# Altium PCB PCB1.PcbDoc
Units mm, origin at the board's own origin, x right, y up, seen from the top; angles counter-clockwise.
Board outline 89.53 x 84.58 mm, 2 copper layers (Top Layer, Bottom Layer); 78 components, 88 nets, 352 pads, 108 vias.
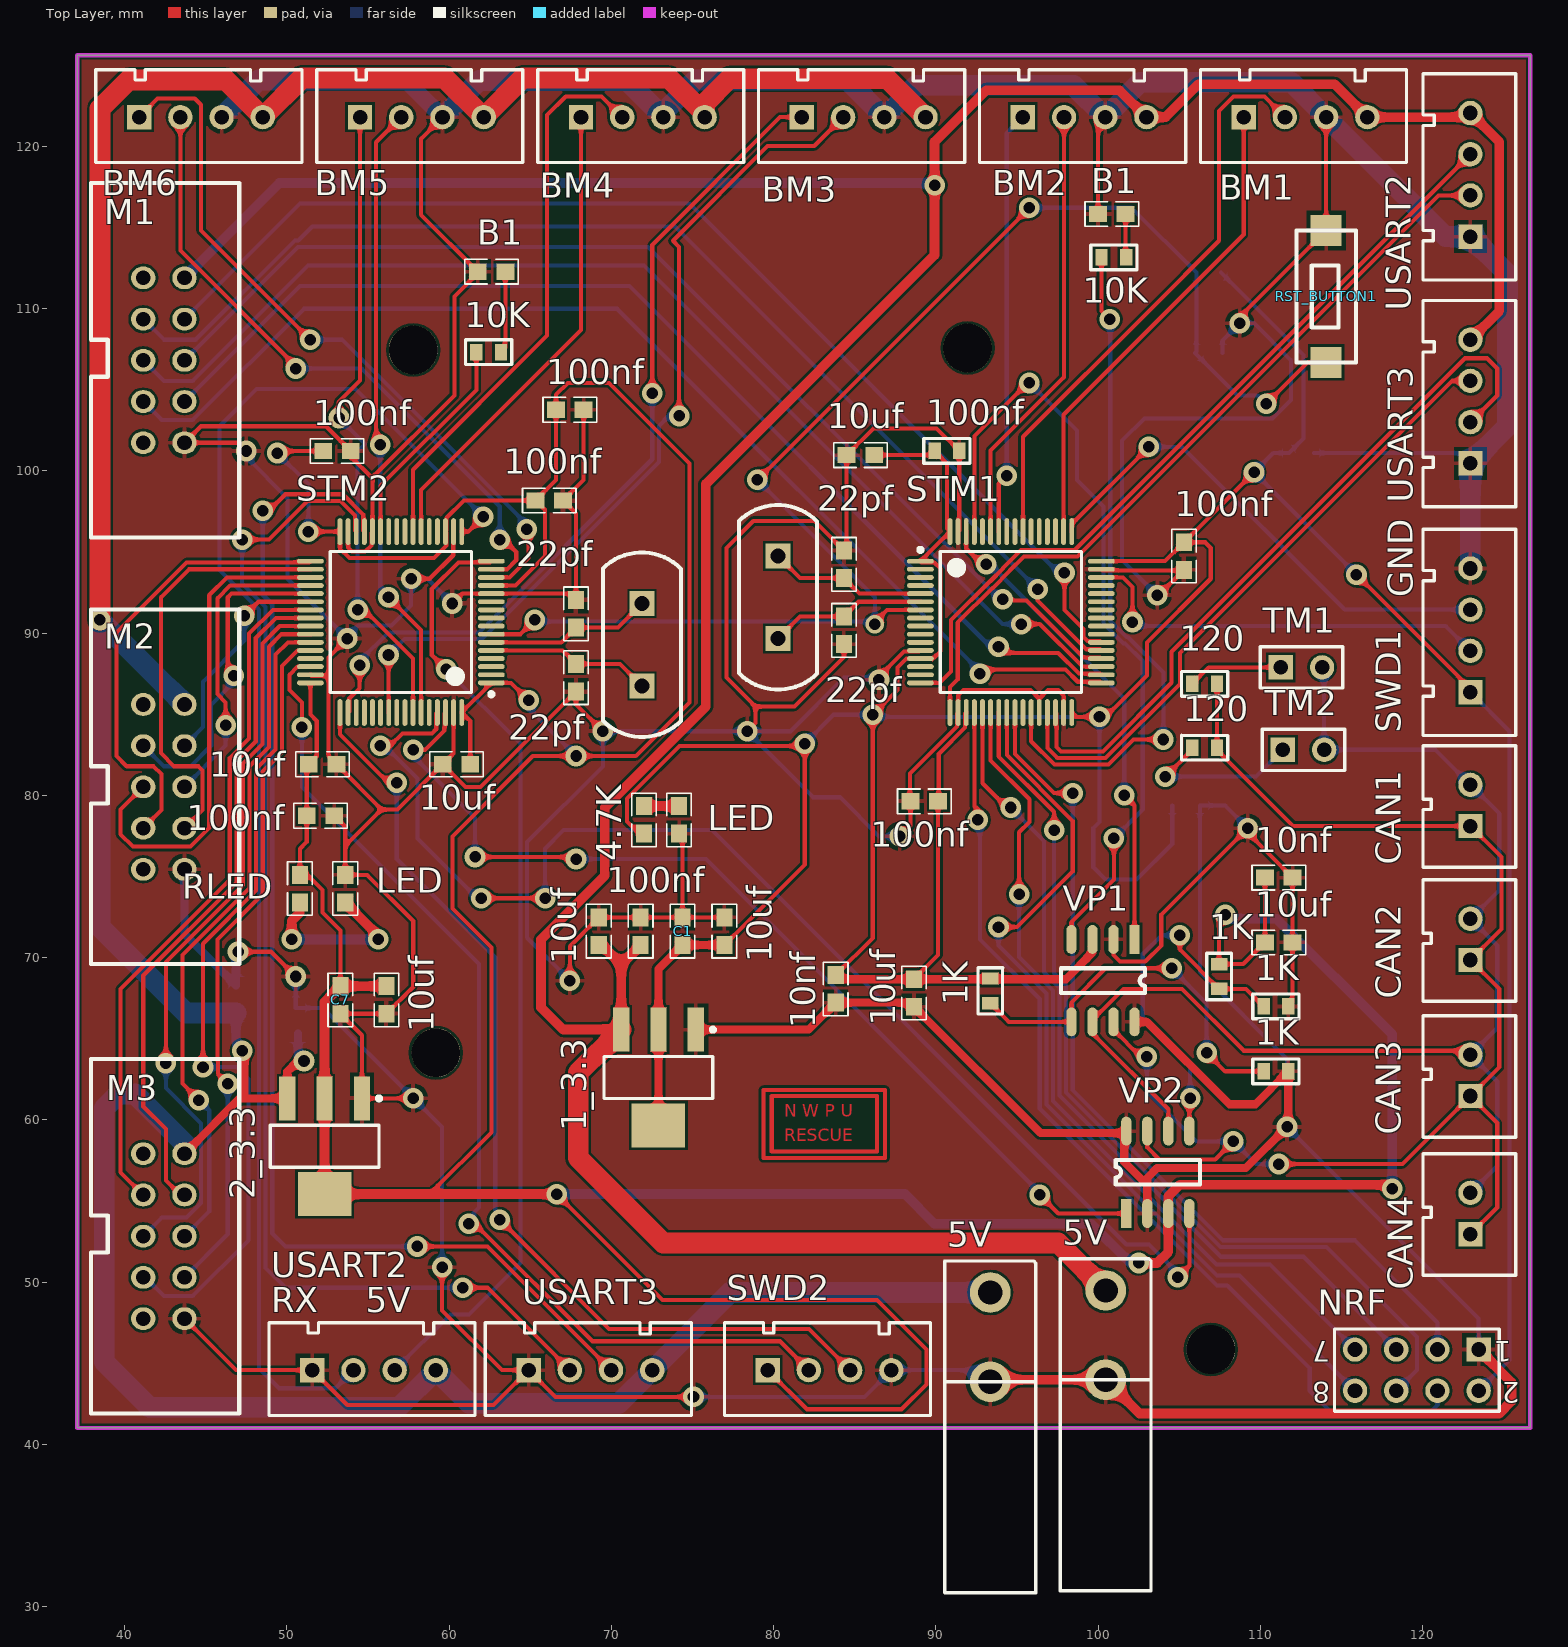
[diagram p0: Top Layer view]
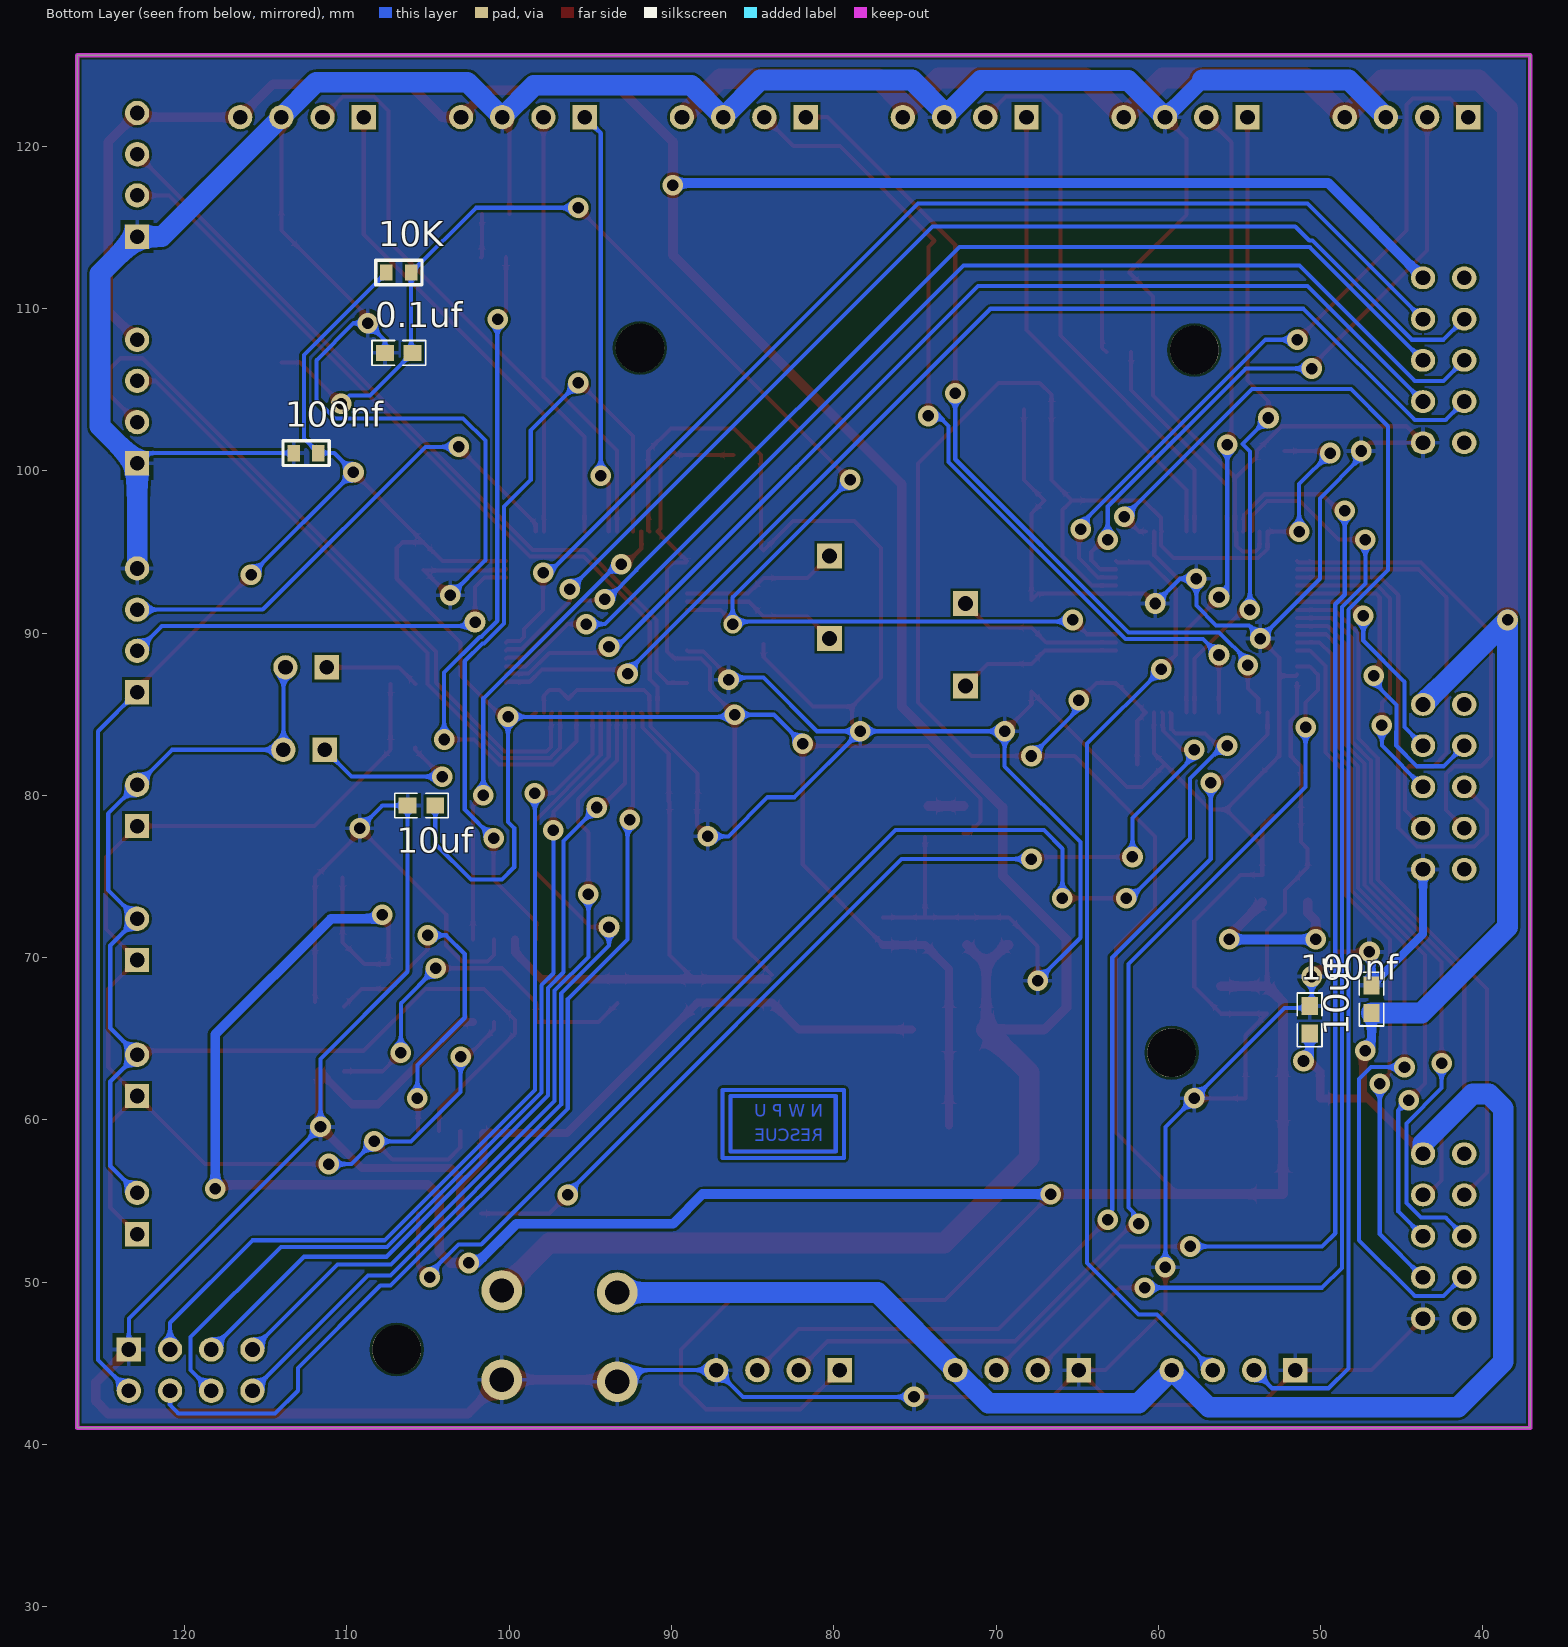
[diagram p1: Bottom Layer view, seen from below]

## Layer stack, top to bottom
Top Solder: solder mask 0.0102, Solder Resist, Dk 3.5
Top Layer: signal copper 0.0356
Dielectric 1: dielectric 0.32, FR-4, Dk 4.8
Bottom Layer: signal copper 0.0356
Bottom Solder: solder mask 0.0102, Solder Resist, Dk 3.5

## Board outline
37.084,41.021 37.084,125.603 126.619,125.603 126.619,41.021

## Design rules (kind name [scope] priority, off if disabled: settings)
Clearance [All] p1: gap=0.152
PolygonConnect [All] p1: connectstyle=Relief reliefconductorwidth=0.254 reliefentries=4 polygonreliefangle="90 Angle" airgapwidth=0.254
RoutingVias [All] p1: holewidth=0.711 width=1.27 viastyle="Through Hole" minholewidth=0.711 minwidth=1.27 maxholewidth=0.711 maxwidth=1.27
SolderMaskExpansion [All] p1: expansion=0.102
Width [All] p1: maxlimit=1.27 minlimit=0.2 preferedwidth=0.254
30 further rules are at their usual default settings.

## Classes and differential pairs
component class Sheet1: 0.1uf 1_3.3 1K 4.7K 5V 10K 10nf 10uf 22pf 100nf 120 B1 C1 LED NRF RST_BUTTON1 TM1 VP1
component class Sheet2: 1K 2_3.3 4.7K 5V 10K 10nf 10uf 22pf 100nf 120 B1 C7 LED M2 M3 TM2 VP2

## Components (designator, comment, footprint, x,y, rotation, side; value= is the part's Value field where it differs from the comment)
0.1uf "0.1uf" 0603 106.807,107.264 r0 bottom (schematic designator C_RST1)
1_3.3 "1117_WYN" SOT223_M 72.898,62.611 r270 top (schematic designator 1)
1K "1k" 0603_WYH 93.345,67.945 r90 top (schematic designator CANR1)
1K "1k" 0603_WYH 110.95,62.992 r0 top (schematic designator CANR2)
1K "1k" 0603_WYH 107.442,68.834 r90 top (schematic designator CANR3)
1K "1k" 0603_WYH 110.95,66.988 r0 top (schematic designator CANR4)
2 "XTAL1" XTAL_D 80.264,94.742 r270 top
2_3.3 "1117_WYN" SOT223_M 52.324,58.374 r270 top (schematic designator 4)
4.7K "4.7K" 0603 72.009,78.486 r270 top (schematic designator R_LED1)
5 "XTAL" XTAL_D 71.882,86.741 r90 top
5V "Header2" Power 100.457,43.942 r90 top (schematic designator E_HEAD1)
5V "Header2" POWER 93.345,43.815 r90 top (schematic designator E_HEAD3)
10K "10K" 0603_WYH 100.965,113.157 r0 top (schematic designator LS3)
10K "10K" 0603_WYH 62.436,107.315 r0 top (schematic designator LS6)
10K "R_10K" 0603_WYH 106.807,112.218 r180 bottom (schematic designator R_RST1)
10nf "10nF" 0603 83.82,68.072 r90 top (schematic designator C_CAN2)
10nf "10nF" 0603 111.125,74.93 r180 top (schematic designator C_CAN4)
10uf "10uf" 0603 76.962,71.628 r90 top (schematic designator C2)
10uf "10uf" 0603 69.215,71.628 r90 top (schematic designator C4)
10uf "10uf" 0603 56.134,67.391 r270 top (schematic designator C8)
10uf "10uf" 0603 46.863,67.437 r90 bottom (schematic designator C10)
10uf "10uF" 0603 88.646,67.818 r90 top (schematic designator C_CAN1)
10uf "10uF" 0603 111.125,70.934 r180 top (schematic designator C_CAN3)
10uf "10uf" 0603 85.344,100.965 r180 top (schematic designator VDD3)
10uf "10uf" 0603 60.452,81.915 r180 top (schematic designator VDD7)
10uf "10uf" 0603 52.197,81.915 r0 top (schematic designator VDDA4)
10uf "10uf" 0603 105.41,79.375 r0 bottom (schematic designator VDDA2)
22pf "22pf" 0603 84.328,94.234 r270 top (schematic designator C5)
22pf "22pf" 0603 84.328,90.17 r90 top (schematic designator C6)
22pf "22pf" 0603 67.818,87.249 r90 top (schematic designator C11)
22pf "22pf" 0603 67.818,91.186 r270 top (schematic designator C12)
100nf "C_100nf" 0603 71.797,71.628 r90 top (schematic designator C3)
100nf "C_100nf" 0603 50.673,66.167 r90 bottom (schematic designator C9)
100nf "100nf" 0603 105.283,94.742 r270 top (schematic designator VDD1)
100nf "100nf" 0603_WYH 90.678,101.219 r0 top (schematic designator VDD2)
100nf "100nf" 0603_WYH 112.522,101.092 r0 bottom (schematic designator VDD4)
100nf "100nf" 0603 52.07,78.74 r0 top (schematic designator VDD5)
100nf "100nf" 0603 53.086,101.219 r0 top (schematic designator VDD6)
100nf "100nf" 0603 67.437,103.759 r0 top (schematic designator VDD8)
100nf "100nf" 0603 89.281,79.629 r180 top (schematic designator VDDA1)
100nf "100nf" 0603 66.167,98.171 r0 top (schematic designator VDDA3)
120 "R_120" 0603_WYH 106.553,86.868 r180 top (schematic designator R1)
120 "R_120" 0603_WYH 106.553,82.931 r180 top (schematic designator R2)
B1 "LED_WYN" 0603 100.838,115.824 r180 top (schematic designator L3)
B1 "LED_WYN" 0603 62.611,112.268 r180 top (schematic designator L6)
BM1 "Comment" XH2.54-4 113.157,124.333 r0 top
BM2 "Comment" XH2.54-4 99.543,124.333 r0 top
BM3 "Comment" XH2.54-4 85.928,124.333 r0 top
BM4 "Comment" XH2.54-4 72.314,124.333 r0 top
BM5 "Comment" XH2.54-4 58.699,124.333 r0 top
BM6 "Comment" XH2.54-4 45.085,124.333 r0 top
C1 "C_100nf" 0603 74.38,71.628 r90 top
C7 "C_100nf" 0603 53.298,67.391 r270 top
CAN1 "Comment" XH2.54_2 121.285,80.391 r90 top
CAN2 "Comment" XH2.54_2 121.285,72.136 r90 top
CAN3 "Comment" XH2.54_2 121.285,63.754 r90 top
CAN4 "Comment" XH2.54_2 121.285,55.245 r90 top
LED "LED_WYN" 0603 74.168,78.486 r270 top (schematic designator E_LED1)
LED "LED_WYN" 0603 53.594,74.249 r90 top (schematic designator E_LED2)
M1 "Comment" JTAG_10to20 41.148,106.807 r0 top
M2 "M1-M2" JTAG_10to20 41.148,80.518 r0 top
M3 "M3-M4" JTAG_10to20 41.148,52.832 r0 top
NRF "Header 4X2" HDR2X4 123.444,45.847 r180 top (schematic designator P6)
RLED "4.7K" 0603 50.8,74.249 r90 top (schematic designator R_LED2)
RST_BUTTON1 "RST_BUTTON" CLCK 114.046,106.68 r90 top
STM1 "STM32_F103" STM32TSQFP50P1200X1200X160-64N 94.615,90.678 r0 top
STM2 "STM32_F103" STM32TSQFP50P1200X1200X160-64N 57.023,90.678 r180 top
SWD1 "Comment" XH2.54-4 120.396,90.551 r90 top
SWD2 "Comment" XH2.54-4 83.82,47.117 r0 top
TM1 "Header2" HDR1X2 111.252,87.884 r0 top
TM2 "Header2" HDR1X2 111.379,82.804 r0 top
USART2 "Comment" XH2.54-4 55.753,47.117 r0 top
USART2 "Comment" XH2.54-4 120.396,118.618 r90 top
USART3 "Comment" XH2.54-4 69.088,47.117 r0 top
USART3 "Comment" XH2.54-4 120.396,104.648 r90 top
VP1 "VP230" VP230 102.235,71.12 r270 top
VP2 "VP230" VP230 101.727,54.229 r90 top
? "Comment" LOGO 81.915,60.579 r0 top

## Footprints (in the part's own frame and the unit in brackets; to place one, negate y for a bottom-side part, rotate by r counter-clockwise, add the part's x,y. Pads: shape width x height; smd on the part's side, far side on the other; paste and mask are expansions set on the pad)
0603 [mm]
  rect 1.1x1 smd: 1(-0.85,0) 2(0.85,0)
  silkscreen extent -1.65,-0.76 1.65,0.76, body extent -1.14,-0.38 1.14,0.38, height 1
0603_WYH [mil]
  rect 30x40 smd: 1(-30,0) 2(30,0)
  silkscreen extent -56,-30 56,30
CLCK [mil]
  rect 75x75 smd: 1(0,0) 2(320,0)
  silkscreen extent 0,-72 320,72
HDR1X2 [mm] "Connector; Header; 2 Position"
  rect 1.5x1.5 hole 0.9: 1(0,0)
  round 1.5 hole 0.9: 2(2.54,0)
  silkscreen extent -1.27,-1.27 3.81,1.27
HDR2X4 [mm] "Connector; Header; 4x2 Position"
  rect 1.5x1.5 hole 0.9: 1(0,0)
  round 1.5 hole 0.9: 2(0,2.54) 3(2.54,0) 4(2.54,2.54) 5(5.08,0) 6(5.08,2.54) 7(7.62,0) 8(7.62,2.54)
  silkscreen extent -1.27,-1.27 8.89,3.81
JTAG_10to20 [mil]
  oval 59x55 hole 35.4: 1(0,200) 2(0,100) 3(0,0) 4(0,-100) 5(0,-200) 6(100,-200) 7(100,-100) 8(100,0) 9(100,100) 10(100,200)
  silkscreen extent -127,-430 233,430
LOGO [mm]
  Top Layer lines w0.254: -2.54,-2.921 4.953,-2.921 4.953,1.27 -2.54,1.27 -2.54,1.016 -2.54,-2.921 ; -2.032,-2.54 4.445,-2.54 4.445,0.889 -2.032,0.889 -2.032,-2.54
  Bottom Layer lines w0.254: -2.54,-2.921 4.953,-2.921 4.953,1.27 -2.54,1.27 -2.54,-2.921 ; -2.032,-2.54 4.445,-2.54 4.445,0.889 -2.032,0.889 -2.032,-2.54
Power [mm]
  round 2.5 hole 1.5: 1(5.546,0) 2(0.046,0)
  silkscreen extent -12.95,-2.8 7.49,2.8
POWER [mm]
  round 2.5 hole 1.5: 1(5.546,0) 2(0.046,0)
  silkscreen extent -12.95,-2.8 7.49,2.8
SOT223_M [mm] "SOT223, 4-Leads, Body 6.5x3.5mm, Pitch 2.3mm, Lead Span 7mm, IPC Low Density"
  rect 2.7x1 smd: 1(-2.95,2.3) 2(-2.95,0) 3(-2.95,-2.3)
  rect 2.7x3.3 smd: 4(2.95,0)
  silkscreen extent -3.07,-3.35 1.3,3.48, body extent -1.85,-3.35 1.85,3.35, height 1.7
STM32TSQFP50P1200X1200X160-64N [mm] "TSQFP, 64-Leads, Body 12.0x12.0mm (max), Pitch 0.50mm, IPC Medium Density"
  oval 1.65x0.3 smd: 1(-5.575,3.75) 2(-5.575,3.25) 3(-5.575,2.75) 4(-5.575,2.25) 5(-5.575,1.75) 6(-5.575,1.25) 7(-5.575,0.75) 8(-5.575,0.25) 9(-5.575,-0.25) 10(-5.575,-0.75) 11(-5.575,-1.25) 12(-5.575,-1.75) 13(-5.575,-2.25) 14(-5.575,-2.75) 15(-5.575,-3.25) 16(-5.575,-3.75) 33(5.575,-3.75) 34(5.575,-3.25) 35(5.575,-2.75) 36(5.575,-2.25) 37(5.575,-1.75) 38(5.575,-1.25) 39(5.575,-0.75) 40(5.575,-0.25) 41(5.575,0.25) 42(5.575,0.75) 43(5.575,1.25) 44(5.575,1.75) 45(5.575,2.25) 46(5.575,2.75) 47(5.575,3.25) 48(5.575,3.75)
  oval 0.3x1.65 smd: 17(-3.75,-5.575) 18(-3.25,-5.575) 19(-2.75,-5.575) 20(-2.25,-5.575) 21(-1.75,-5.575) 22(-1.25,-5.575) 23(-0.75,-5.575) 24(-0.25,-5.575) 25(0.25,-5.575) 26(0.75,-5.575) 27(1.25,-5.575) 28(1.75,-5.575) 29(2.25,-5.575) 30(2.75,-5.575) 31(3.25,-5.575) 32(3.75,-5.575) 49(3.75,5.575) 50(3.25,5.575) 51(2.75,5.575) 52(2.25,5.575) 53(1.75,5.575) 54(1.25,5.575) 55(0.75,5.575) 56(0.25,5.575) 57(-0.25,5.575) 58(-0.75,5.575) 59(-1.25,5.575) 60(-1.75,5.575) 61(-2.25,5.575) 62(-2.75,5.575) 63(-3.25,5.575) 64(-3.75,5.575)
  silkscreen extent -5.7,-4.35 4.35,4.57, body extent -5,-5 5,5, height 1.6
VP230 [mil]
  rect 70x25 smd: 1(0,0)
  oval 70x25 smd: 2(0,-51) 3(0,-102) 4(0,-153) 5(200,-153) 6(200,-102) 7(200,-51) 8(200,0)
  silkscreen extent 70,-178 130,26
XH2.54-4 [mm]
  rect 1.5x1.5 hole 0.9: 1(-4.191,-2.54)
  round 1.5 hole 0.9: 2(-1.651,-2.54) 3(0.889,-2.54) 4(3.429,-2.54)
  silkscreen extent -6.86,-5.33 5.84,0.38
XH2.54_2 [mm]
  rect 1.5x1.5 hole 0.9: 1(-2.286,-1.651)
  round 1.5 hole 0.9: 2(0.254,-1.651)
  silkscreen extent -4.83,-4.44 2.67,1.27
XTAL_D [mil]
  rect 60x60 hole 36 paste+0: 1(0,0) 2(200,0)
  silkscreen extent -124,-95 324,95

## Part data
0.1uf 10nf 10nf 10uf 10uf 10uf 10uf 10uf 10uf 10uf 10uf 10uf 10uf 22pf 22pf 22pf 22pf 100nf 100nf 100nf 100nf 100nf 100nf 100nf 100nf 100nf 100nf C1 C7: library part CAP_WYN
1K 1K 1K 1K 10K 10K 10K 120 120: library part R
2: library part XTAL
4.7K RLED: library part RES_WYN
M2 M3: library part 电机接口
NRF: "Header, 4-Pin, Dual row"

## Free pads (board coordinates)
  round 3 hole 3 unplated: 1(59.182,64.135) 2(106.934,45.847) 3(91.948,107.569) 4(57.785,107.442)

## Via types
v1: diameter 1.27, hole 0.711, Top Layer to Bottom Layer, 107 vias
v2: diameter 1.15, hole 0.711, Top Layer to Bottom Layer, 1 vias

## Nets (pads, with @x,y where several pads share a name; then routed paths per layer and width w, separated by ;. In a path a pad name is that pad's centre, name@x,y a point inside that pad or via, vN(x,y) a via of type N, cw(c..) or ccw(c..) an arc to the next point about the centre after c; other vN are vias at no path point)
B1_PA15: BM3.1 STM2.50 | length 52.3
  Top Layer w0.254: STM2.50 53.844,85.174 53.844,85.956 54.483,86.595 v1(54.483,88.011) ; v1(72.517,104.775) 72.517,113.919 80.391,121.793 BM3.1
  Bottom Layer w0.254: v1(54.483,88.011) 54.483,88.265 56.261,90.043 61.849,90.043 72.517,100.711 v1(72.517,104.775)
B1_PB3: BM3.2 STM2.55 | length 53.5
  Top Layer w0.254: v1(56.261,88.646) 56.273,88.634 STM2.55 ; v1(74.168,103.378) 74.168,113.792 73.787,114.173 79.629,120.015 82.499,120.015 BM3.2
  Bottom Layer w0.254: v1(56.261,88.646) 57.252,89.637 62.017,89.637 72.923,100.543 72.923,102.768 73.533,103.378 v1(74.168,103.378)
B2_PA6: BM4.1 STM2.22 | length 29.6
  Top Layer w0.254: STM2.22 58.273,98.826 68.123,108.676 BM4.1
B2_PA7: BM4.2 STM2.23 | length 34.7
  Top Layer w0.254: STM2.23 57.773,100.064 66.04,108.331 66.04,121.92 67.183,123.063 69.393,123.063 BM4.2
B3_PB6: BM5.1 STM2.58 | length 39.7
  Top Layer w0.254: v1(53.213,103.251) 53.213,104.267 54.508,105.562 BM5.1 ; v1(54.356,91.44) 54.76,91.44 57.773,88.427 STM2.58
  Bottom Layer w0.254: v1(53.213,103.251) 54.812,101.652 54.356,101.196 v1(54.356,91.44)
B3_PB7: BM5.2 STM2.59 | length 38.6
  Top Layer w0.254: v1(55.753,101.6) 55.499,101.854 55.499,120.244 BM5.2 ; v1(56.261,92.202) 58.273,90.19 STM2.59
  Bottom Layer w0.254: v1(55.753,101.6) 55.753,92.456 56.007,92.202 v1(56.261,92.202)
B4_PA0: BM6.1 STM2.14 | length 44.6
  Top Layer w0.254: BM6.1 42.037,122.936 44.323,122.936 44.704,122.555 44.704,114.808 v1(51.435,108.077) ; STM2.14 63.71,93.428 64.897,94.615 64.897,96.012 v1@64.643,96.266
  Bottom Layer w0.254: v1(51.435,108.077) 53.407,108.077 64.77,96.714 v1(64.77,96.393)
B4_PA1: BM6.2 STM2.15 | length 40.2
  Top Layer w0.254: BM6.2 43.434,113.575 50.546,106.463 v1(50.546,106.299) ; STM2.15 63.575,93.928 64.135,94.488 64.135,94.996 63.373,95.758 v1(63.119,95.758)
  Bottom Layer w0.254: v1(50.546,106.299) 54.61,106.299 63.119,97.79 v1(63.119,95.758)
B11_PA15: BM1.1 STM1.50 | length 30.1
  Top Layer w0.254: STM1.50 97.865,103.453 108.966,114.554 BM1.1
B11_PB3: BM1.2 STM1.55 | length 35.9
  Top Layer w0.254: STM1.55 95.365,102.096 103.188,109.918 107.442,114.173 107.442,122.174 108.331,123.063 110.236,123.063 BM1.2
B13_PB6: BM2.1 STM1.58 | length 26.2
  Top Layer w0.254: STM1.58 93.865,99.199 v1(94.361,99.695)
  Bottom Layer w0.254: v1(94.361,99.695) 94.361,120.802 BM2.1
B13_PB7: BM2.2 STM1.59 | length 27.4
  Top Layer w0.254: STM1.59 93.365,101.239 97.892,105.766 BM2.2
BT_RX: STM1.43
BT_TX: STM1.42
CANH: 120.1 CAN1.1 CAN2.1 CAN3.1 CAN4.1 VP1.7 VP2.7 | length 87.2
  Top Layer w0.254: VP1.7 100.94,65.557 102.616,63.881 v1(102.997,63.881) ; VP2.7 103.022,58.289 103.759,57.552 107.209,57.552 v1(108.331,58.674) ; 120.1@107.315,86.868 107.315,82.804 112.014,78.105 CAN1.1 124.841,76.2 124.841,71.755 CAN2.1 124.714,68.072 124.714,63.246 CAN3.1 ; v1(111.125,57.277) 118.745,57.277 CAN3.1 ; CAN4.1 124.587,54.61 124.587,59.817 CAN3.1
  Bottom Layer w0.254: v1(102.997,63.881) 102.997,61.722 106.045,58.674 v1(108.331,58.674) 109.728,57.277 v1(111.125,57.277)
CANL: CAN1.2 CAN2.2 CAN3.2 CAN4.2 TM1.2 TM2.2 VP1.6 VP2.6 | length 79
  Top Layer w0.254: VP2.6 104.318,60.655 99.644,65.329 VP1.6 99.644,66.16 101.556,68.072 105.156,68.072 108.966,64.262 122.682,64.262 CAN3.2
  Bottom Layer w0.254: TM1.2 113.919,87.757 TM2.2 120.777,82.804 CAN1.2 124.714,78.867 124.714,74.168 CAN2.2 124.587,70.739 124.587,65.659 CAN3.2 124.587,62.357 124.587,57.15 CAN4.2
CANRX1: STM1.61 VP1.4 | length 49.7
  Top Layer w0.254: STM1.61 92.365,102.144 v1@95.694,105.474 ; VP1.4 98.349,72.187 100.965,74.803 v1(100.965,77.343)
  Bottom Layer w0.254: v1(95.758,105.41) 98.679,102.489 98.679,99.441 100.33,97.79 100.33,90.588 101.561,89.357 101.651,89.357 102.743,88.265 102.743,79.121 v1(100.965,77.343)
CANRX2: STM2.61 VP2.4 | length 79.9
  Top Layer w0.254: v1(55.753,83.058) 56.365,83.058 57.127,83.82 58.949,83.82 59.202,84.073 59.202,85.032 STM2.61 ; v1@61.976,73.787 v1(61.976,73.66) v1(65.913,73.66) ; v1(104.902,50.292) 105.613,51.003 VP2.4
  Bottom Layer w0.254: v1@56.007,82.804 v1(55.753,83.058) 56.007,83.058 58.039,81.026 58.039,77.343 61.722,73.66 v1(61.976,73.66) ; v1(65.913,73.66) 65.913,76.708 67.056,77.851 76.2,77.851 101.727,52.324 103.124,52.324 104.902,50.546 v1(104.902,50.292)
CANTX1: STM1.62 VP1.1 | length 29.8
  Top Layer w0.254: STM1.62 91.865,95.206 92.837,94.234 v1(93.091,94.234) ; v1(101.6,80.01) 102.235,79.375 VP1.1
  Bottom Layer w0.254: v1@93.218,94.361 101.6,85.979 101.6,85.344 ; v1(101.6,80.01) 101.6,85.471
CANTX2: STM2.62 VP2.1 | length 61.2
  Top Layer w0.254: v1(57.785,82.804) 58.508,82.804 59.702,83.999 59.702,85.032 STM2.62 ; v1(61.595,76.2) v1@67.818,76.2 ; v1(96.393,55.372) 97.536,54.229 VP2.1
  Bottom Layer w0.254: v1(57.785,82.804) 57.785,82.423 61.595,78.613 v1(61.595,76.2) ; v1(67.818,76.073) 75.819,76.073 96.139,55.753 96.139,55.372 v1@96.393,55.118
CE: NRF.3 STM1.25 | length 55.5
  Top Layer w0.254: STM1.25 94.865,82.554 97.282,80.137 v1(98.425,80.137)
  Bottom Layer w0.254: v1(98.425,80.137) 98.425,61.849 107.696,52.578 115.824,52.578 120.904,47.498 NRF.3
CSN: NRF.4 STM1.20 | length 60.3
  Top Layer w0.254: STM1.20 92.365,79.339 v1@93.027,78.676
  Bottom Layer w0.254: v1(92.583,78.486) 92.71,78.359 92.71,71.12 96.393,67.437 96.393,60.706 107.315,49.784 107.95,49.784 113.03,44.704 113.03,43.307 114.427,41.91 120.396,41.91 120.904,42.418 NRF.4
GND: 0.1uf.2 1_3.3.1 1K.2@111.712,62.992 1K.2@111.712,66.988 2_3.3.1 5V.2 10nf.1 10uf.1@88.646,66.968 10uf.1@111.975,70.934 10uf.2@46.863,68.287 10uf.2@53.047,81.915 10uf.2@56.134,66.541 10uf.2@59.602,81.915 10uf.2@69.215,72.478 10uf.2@76.962,72.478 10uf.2@84.494,100.965 10uf.2@106.26,79.375 22pf.1 100nf.2 B1.2 BM1.3 BM2.3 BM3.3 BM4.3 BM5.3 BM6.3 C1.2 C7.2 LED.2 M1.6 M2.6 M3.6 NRF.1 RST_BUTTON1.2 STM1.12 STM1.18 STM1.28 STM1.31 STM1.47 STM1.63 STM2.12 STM2.18 STM2.28 STM2.31 STM2.47 STM2.63 SWD1.4 SWD2.4 USART2.1 USART3.1 VP1.2 VP1.8 VP2.2 VP2.8 | length 754.1
  Top Layer w0.254: M3.6 46.863,44.577 51.562,44.577 53.721,42.418 62.738,42.418 USART3.1@64.897,44.577 ; v1(46.99,70.358) 49.022,70.358 v1(50.546,68.834) ; v1(47.498,101.219) 46.99,101.727 M1.6 44.704,102.743 52.412,102.743 53.936,101.219 53.941,100.84 55.247,99.57 60.325,104.648 60.325,110.744 61.761,112.18 61.761,112.268 58.254,115.775 58.254,120.459 BM5.3 ; STM2.47 51.519,87.357 52.552,87.357 ; 100nf.2@52.92,78.74 53.594,78.066 53.594,76.874 ; v1(53.721,89.662) 52.552,88.493 52.552,87.357 ; STM2.31 53.773,95.265 54.016,95.021 54.824,95.021 55.202,95.4 STM2.28@55.202,96.182 ; STM2.28 55.273,99.596 ; v1(57.658,93.345) 58.801,93.345 60.25,94.794 60.25,96.23 STM2.18 ; v1(57.785,61.341) 57.768,61.324 2_3.3.1 54.624,65.215 C7.2 56.134,66.541 57.785,68.192 57.785,72.263 54.949,75.099 53.594,75.099 53.594,76.874 ; v1(59.563,50.927) 59.563,48.26 63.246,44.577 USART3.1@64.897,44.577 ; v1(60.198,91.821) 60.805,92.428 STM2.12 67.426,92.428 67.818,92.036 67.818,97.37 67.017,98.171 68.287,99.441 100nf.2@68.287,103.759 ; STM2.63 60.273,82.586 10uf.2@59.602,81.915 ; v1(67.437,68.58) 67.437,70.7 69.215,72.478 71.797,72.478 C1.2 ; v1(69.469,83.947) 67.818,85.598 67.818,86.399 61.937,80.518 60.999,80.518 10uf.2@59.602,81.915 ; LED.2@74.38,77.424 C1.2 ; v1(75.057,42.926) 66.548,42.926 USART3.1@64.897,44.577 ; 10uf.2@76.962,72.478 C1.2 ; v1(78.359,83.947) 78.867,84.455 78.867,85.471 ; 22pf.1@84.328,89.32 84.328,88.519 81.28,85.471 78.867,85.471 ; v1(86.487,87.122) 86.487,87.316 88.029,88.857 88.969,88.857 STM1.12 ; v1(87.757,77.47) 88.431,78.144 100nf.2@88.431,79.629 ; 100nf.2@88.392,79.629 88.392,81.348 91.294,84.25 91.294,85.032 STM1.18 91.365,86.158 91.694,86.487 95.829,86.487 96.365,85.951 96.901,86.487 97.536,86.487 97.865,86.158 STM1.31 ; STM1.63 91.436,96.324 91.436,101.215 91.44,101.219 90.043,102.616 86.145,102.616 84.494,100.965 84.494,95.25 84.328,95.084 82.511,96.901 78.74,96.901 77.089,95.25 77.089,87.249 78.867,85.471 ; 5V.2@93.345,43.861 5V.2@93.472,43.988 ; B1.2@99.988,115.824 99.988,121.349 BM2.3 ; STM1.47 100.261,93.857 100nf.2@105.248,93.857 ; VP1.2 100.94,70.155 101.346,69.748 102.895,69.748 103.886,70.739 103.886,72.644 108.927,77.685 v1@109.22,77.685 ; v1(103.632,92.329) 103.72,92.329 100nf.2@105.248,93.857 ; 100nf.2@105.283,93.892 100nf.2@105.248,93.857 ; v1(108.712,109.093) 108.712,109.474 RST_BUTTON1.2 BM1.3 ; v1(109.22,77.978) v1@109.22,77.685 ; 1K.2@111.975,67.251 111.975,70.934 111.975,74.93 v1@109.22,77.685 ; 52.552,87.357 52.552,82.41 53.047,81.915 55.841,79.121 ; 53.594,76.874 55.841,79.121 ; 55.841,79.121 56.808,79.121 10uf.2@59.602,81.915
  Top Layer w0.5: 1_3.3.1 82.159,65.561 83.82,67.222 88.392,67.222 88.646,66.968 96.432,59.182 101.6,59.182 101.6,57.404 103.022,55.982 ; VP1.8 102.997,66.04 108.077,60.96 109.68,60.96 111.712,62.992 111.712,59.642 v1(111.633,59.563) 109.093,57.023 103.632,57.023 103.022,56.413 VP2.2
  Top Layer w0.6: 5V.2@93.472,43.988 100.457,43.988 102.535,41.91 124.714,41.91 125.476,42.672 125.476,43.815 NRF.1
  Bottom Layer w0.254: v1(47.498,101.219) 47.498,100.838 50.038,98.298 50.038,93.345 v1(53.721,89.662) ; v1(50.546,68.834) 50.546,66.89 52.236,66.89 v1(57.785,61.341) 59.563,59.563 v1(59.563,50.927) ; v1@53.848,89.916 54.406,90.474 56.438,90.474 57.658,91.694 v1(57.658,93.345) 58.674,93.345 v1(60.198,91.821) ; v1(67.437,68.58) 64.795,71.222 64.795,77.114 69.469,81.788 v1(69.469,83.947) v1(78.359,83.947) ; BM4.3 BM4.3@73.203,122.098 ; v1(75.057,42.926) 85.598,42.926 SWD2.4 92.629,44.577 5V.2@93.345,43.861 ; v1@86.487,87.249 84.328,87.249 81.026,83.947 v1(78.359,83.947) ; v1(87.757,77.47) 86.487,77.47 84.074,79.883 82.423,79.883 v1(78.359,83.947) ; v1(103.632,92.329) 101.473,94.488 101.473,101.854 102.845,103.226 110.742,103.226 111.887,104.371 111.887,106.807 109.601,109.093 v1(108.712,109.093) 107.657,108.038 0.1uf.2 ; v1(109.22,77.978) 107.823,79.375 106.26,79.375 106.26,69.127 111.633,63.754 v1(111.633,59.563) 123.444,47.752 NRF.1 ; 100nf.2@113.284,101.092 122.301,101.092 USART3.1@122.936,100.457
  Bottom Layer w0.5: M2.6 43.688,71.462 46.863,68.287 46.863,70.231 v1(46.99,70.358)
  Bottom Layer w1: 57.302,124.079 BM5.3
  Bottom Layer w1.27: BM6.3 48.26,124.079 57.302,124.079 ; BM5.3 61.849,124.054 70.942,124.054 BM4.3 ; BM4.3@73.203,122.098 75.184,124.079 84.531,124.079 BM3.3 88.773,123.749 98.476,123.749 BM2.3 102.591,123.952 111.887,123.952 BM1.3 121.412,114.427 122.936,114.427 125.222,112.141 125.222,102.743 122.936,100.457 SWD1.4
IRQ: NRF.8 STM1.24 | length 56
  Top Layer w0.254: v1(93.853,71.882) 94.996,71.882 98.425,75.311 98.425,78.419 94.365,82.479 STM1.24
  Bottom Layer w0.254: v1(93.853,71.882) 93.853,70.739 96.799,67.793 96.799,60.935 107.315,50.419 108.712,50.419 NRF.8
LS11: STM1.26
LS12: 10K.1@100.203,113.157 STM1.27 | length 42.5
  Top Layer w0.254: STM1.27 95.865,83.332 97.307,81.89 100.625,81.89 102.175,83.439 v1(104.013,83.439) ; 10K.1@100.203,113.157 100.203,109.855 v1(100.711,109.347)
  Bottom Layer w0.254: v1@100.736,109.347 100.736,90.756 101.729,89.764 101.819,89.764 104.013,87.57 v1(104.013,83.439)
LS20: STM2.25
LS21: STM2.26
LS22: 10K.1@61.674,107.315 STM2.27 | length 13.5
  Top Layer w0.254: STM2.27 55.773,99.08 61.674,104.981 10K.1@61.674,107.315
M1_PB12: M1.4 STM1.33 | length 72.1
  Top Layer w0.254: v1(92.71,87.503) 92.964,87.757 97.977,87.757 98.736,86.999 100.119,86.999 STM1.33
  Bottom Layer w0.254: M1.4 42.291,103.124 44.196,103.124 51.054,109.982 70.358,109.982 v1@92.71,87.63
M1_PB13: M1.7 STM1.34 | length 69.4
  Top Layer w0.254: v1(93.853,89.154) 94.234,88.773 97.536,88.773 98.81,87.499 100.119,87.499 STM1.34
  Bottom Layer w0.254: M1.7 50.8,111.379 71.12,111.379 93.345,89.154 v1(93.853,89.154)
M1_PB14: M1.3 STM1.35 | length 72.8
  Top Layer w0.254: v1(95.25,90.551) 96.393,90.551 99.016,87.928 STM1.35
  Bottom Layer w0.254: M1.3 42.418,105.537 44.196,105.537 51.308,112.649 72.009,112.649 94.107,90.551 v1(95.25,90.551)
M1_PB15: M1.8 STM1.36 | length 69.9
  Top Layer w0.254: v1(94.107,92.075) 94.742,92.075 94.805,92.011 95.567,92.011 99.08,88.499 100.119,88.499 STM1.36
  Bottom Layer w0.254: M1.8 50.673,113.792 72.263,113.792 92.177,93.878 92.177,93.855 93.957,92.075 v1(94.107,92.075)
M1_PC6: M2.2 STM2.37 | length 20.3
  Top Layer w0.254: v1(46.736,87.376) 46.355,87.757 46.355,92.202 46.581,92.428 STM2.37
  Bottom Layer w0.254: M2.2 42.418,81.788 44.069,81.788 45.339,83.058 45.339,83.924 45.314,83.949 45.314,85.573 46.736,86.995 v1(46.736,87.376)
M2_PC7: M2.9 STM2.38 | length 14
  Top Layer w0.254: v1(47.371,91.059) 48.24,91.928 STM2.38
  Bottom Layer w0.254: M2.9 44.831,84.201 44.831,86.995 47.371,89.535 v1(47.371,91.059)
M3_PC8: M3.2 STM2.39 | length 42.8
  Top Layer w0.254: M3.2 39.751,56.769 39.751,68.072 46.482,74.803 46.482,82.296 47.676,83.49 47.676,89.967 49.137,91.428 STM2.39
M4_PC9: M3.9 STM2.40 | length 42.3
  Top Layer w0.254: M3.9 43.434,55.372 42.545,56.261 42.545,59.436 41.148,60.833 41.148,68.894 46.888,74.635 46.888,82.128 48.082,83.321 48.082,89.687 49.323,90.928 STM2.40
M11_PC6: M1.2 STM1.37 | length 73.7
  Top Layer w0.254: v1(96.266,92.71) 96.266,91.995 99.262,88.999 100.119,88.999 STM1.37
  Bottom Layer w0.254: M1.2 42.418,108.077 44.383,108.077 50.505,114.198 50.698,114.198 51.562,115.062 73.914,115.062 v1(96.266,92.71)
M12_PC7: M1.9 STM1.38 | length 72.3
  Top Layer w0.254: v1(97.917,93.726) 97.917,91.419 99.086,90.25 99.086,89.75 99.337,89.499 100.119,89.499 STM1.38
  Bottom Layer w0.254: M1.9 50.8,116.459 74.803,116.459 97.536,93.726 v1(97.917,93.726)
M_PA8: M3.3 STM2.41 | length 45.6
  Top Layer w0.254: v1(42.545,63.5) 42.545,69.717 47.295,74.466 47.295,81.959 48.489,83.153 48.489,89.322 ; 48.489,89.356 49.561,90.428 STM2.41
  Bottom Layer w0.254: M3.3 42.291,53.975 43.815,53.975 44.717,54.877 44.717,59.781 42.545,61.953 v1(42.545,63.5)
M_PA9: M3.8 STM2.42 | length 42.7
  Top Layer w0.254: v1(44.577,61.214) 43.561,62.23 43.561,70.158 47.701,74.298 47.701,81.791 48.895,82.985 48.895,89.154 49.669,89.928 STM2.42
  Bottom Layer w0.254: M3.8 45.212,54.356 45.212,60.579 v1(44.577,61.214)
M_PA10: M3.4 STM2.43 | length 50.9
  Top Layer w0.254: v1(44.831,63.246) 44.831,70.853 48.108,74.13 48.108,81.623 49.301,82.816 49.301,88.671 50.058,89.428 STM2.43
  Bottom Layer w0.254: M3.4 41.275,50.292 42.418,49.149 44.196,49.149 47.625,52.578 47.625,62.507 46.886,63.246 v1@45.085,63.246
M_PA11: M3.7 STM2.44 | length 42.8
  Top Layer w0.254: v1(46.355,62.23) 45.745,62.84 45.745,63.625 45.72,63.65 45.72,71.12 48.514,73.914 48.514,81.454 49.708,82.648 49.708,87.97 50.666,88.928 STM2.44
  Bottom Layer w0.254: M3.7 46.355,52.959 v1(46.355,62.23)
M_PB12: M2.4 STM2.33 | length 28.4
  Top Layer w0.254: M2.4 42.266,79.096 42.266,81.305 41.783,81.788 40.132,81.788 39.497,82.423 39.497,90.043 43.811,94.357 51.377,94.357 STM2.33
M_PB13: M2.7 STM2.34 | length 26.8
  Top Layer w0.254: M2.7@43.688,78.165 M2.7 44.806,79.096 44.806,81.534 44.552,81.788 43.053,81.788 42.231,82.61 42.231,92.202 43.957,93.928 STM2.34
M_PB14: M2.3 STM2.35 | length 30.8
  Top Layer w0.254: M2.3 39.751,79.121 39.751,77.597 40.513,76.835 44.069,76.835 45.212,77.978 45.212,92.329 46.311,93.428 STM2.35
M_PB15: M2.8 STM2.36 | length 18.9
  Top Layer w0.254: v1(46.228,84.328) 46.228,85.725 45.72,86.233 45.72,92.142 46.506,92.928 STM2.36
  Bottom Layer w0.254: M2.8 46.228,83.058 v1(46.228,84.328)
MISO: NRF.7 STM1.22 | length 51
  Top Layer w0.254: STM1.22 93.365,82.149 95.758,79.756 95.758,78.359 95.123,77.724 v1(95.123,73.914)
  Bottom Layer w0.254: v1(95.123,73.914) 95.123,70.044 97.206,67.961 97.206,61.163 107.283,51.086 110.585,51.086 NRF.7
MOSI: NRF.6 STM1.23 | length 56.8
  Top Layer w0.254: STM1.23 93.865,82.405 97.282,78.988 v1(97.282,77.851)
  Bottom Layer w0.254: v1(97.282,77.851) 97.282,69.034 98.019,68.298 98.019,61.681 107.528,52.172 114.071,52.172 119.634,46.609 119.634,44.577 NRF.6
NetCANR1_1: 1K.1@93.345,67.183 1K.1@110.188,62.992 VP1.5 | length 23.8
  Top Layer w0.254: 1K.1@93.345,67.183 94.488,66.04 VP1.5 98.349,67.234 100.457,69.342 v1(104.521,69.342) ; v1(106.68,64.135) 107.823,62.992 1K.1@110.188,62.992
  Bottom Layer w0.254: v1(104.521,69.342) 106.68,67.183 v1(106.68,64.135)
NetCANR3_1: 1K.1@107.442,68.072 1K.1@110.188,66.988 VP2.5 | length 22.4
  Top Layer w0.254: v1(105.029,71.374) 105.029,70.485 107.442,68.072 109.104,68.072 1K.1@110.188,66.988 ; VP2.5 105.613,61.29 v1(105.664,61.341)
  Bottom Layer w0.254: v1(105.029,71.374) 103.886,71.374 102.743,70.231 102.743,66.294 105.664,63.373 v1(105.664,61.341)
NetE_LED1_1: 4.7K.1 LED.1@74.168,79.336 | length 2.2
  Top Layer w0.6: 4.7K.1 LED.1@74.168,79.336
NetE_LED2_1: LED.1@53.594,73.399 RLED.1 | length 10.9
  Top Layer w0.6: v1(50.292,71.12) 50.292,72.263 50.8,72.771 RLED.1 ; LED.1@53.594,73.399 55.626,71.367 v1(55.626,71.12)
  Bottom Layer w0.6: v1(50.292,71.12) v1(55.626,71.12)
NetL2_1: 
NetL3_1: 10K.2@101.727,113.157 B1.1@101.688,115.824 | length 2.7
  Top Layer w0.254: B1.1@101.688,115.824 101.688,113.196 10K.2@101.727,113.157
NetL4_1: 
NetL5_1: 
NetL6_1: 10K.2@63.198,107.315 B1.1@63.461,112.268 | length 5.1
  Top Layer w0.254: 10K.2@63.198,107.315 63.461,107.578 B1.1@63.461,112.268
NetLED_BT_1: 
NetR1_2: 120.2@105.791,86.868 TM1.1 | length 5.9
  Top Layer w0.254: 120.2@105.791,86.868 106.807,87.884 TM1.1
NetR2_2: 120.2@105.791,82.931 TM2.1 | length 10.4
  Top Layer w0.254: v1(104.14,81.153) 105.791,82.804 120.2@105.791,82.931
  Bottom Layer w0.254: v1(104.14,81.153) 109.728,81.153 TM2.1
RESET1: 0.1uf.1 10K.2@106.045,112.218 RST_BUTTON1.1 STM1.7 STM2.7 | length 90.3
  Top Layer w0.254: STM2.7 64.401,89.928 v1(65.278,90.805) ; v1(78.994,99.441) v1(95.758,116.205) ; v2(86.233,90.551) 86.233,90.678 86.983,91.428 STM1.7 ; v1(110.363,104.14) 112.903,106.68 RST_BUTTON1.1
  Bottom Layer w0.254: v1(65.278,90.805) 65.38,90.703 86.081,90.703 v2(86.233,90.551) 86.233,92.202 v1(78.994,99.441) ; v1(95.758,116.205) 102.058,116.205 106.045,112.218 106.045,107.352 0.1uf.1 108.573,104.648 109.855,104.648 v1(110.363,104.14)
RESET2: 
SCK: NRF.5 STM1.21 | length 52.7
  Top Layer w0.254: STM1.21 92.865,80.744 v1@94.344,79.265
  Bottom Layer w0.254: v1(94.615,79.248) 94.615,79.225 96.647,77.193 96.647,69.094 97.612,68.129 97.612,61.512 107.563,51.562 112.649,51.562 NRF.5
SERVO1: STM1.8
SERVO2: STM1.9
SWCLK1: STM1.49 SWD1.3 | length 31.2
  Top Layer w0.254: STM1.49 98.365,96.714 v1(103.124,101.473)
  Bottom Layer w0.254: v1(103.124,101.473) 105.156,101.473 115.189,91.44 SWD1.3
SWCLK2: STM2.49 SWD2.3 | length 60.3
  Top Layer w0.254: STM2.49 53.273,83.76 56.261,80.772 v1(56.769,80.772) ; v1(63.119,53.848) 69.85,47.117 82.169,47.117 SWD2.3
  Bottom Layer w0.254: v1(56.769,80.772) 56.769,76.073 62.84,70.002 62.84,54.483
SWDIO1: STM1.46 SWD1.2 | length 25.9
  Top Layer w0.254: STM1.46 101.517,93.428 102.108,92.837 v1(102.108,90.678)
  Bottom Layer w0.254: v1(102.108,90.678) 102.362,90.424 121.412,90.424 SWD1.2
SWDIO2: STM2.46 SWD2.2 | length 64.9
  Top Layer w0.254: v1(50.927,84.201) 50.927,85.725 50.165,86.487 50.165,87.427 50.666,87.928 STM2.46 ; v1(61.214,53.594) 61.595,53.594 68.834,46.355 80.391,46.355 SWD2.2
  Bottom Layer w0.254: v1(50.927,84.201) 50.927,80.518 61.849,69.596 61.849,54.61 61.531,54.292 v1@61.531,53.657
U12_RX: STM1.17 USART2.2@122.936,116.967 | length 48.2
  Top Layer w0.254: STM1.17 90.865,86.674 91.338,87.147 91.338,90.637 93.488,92.786 93.511,92.786 94.539,93.814 94.539,93.837 95.418,94.717 98.72,94.717 120.971,116.967 USART2.2@122.936,116.967
U12_TX: STM1.16 USART2.3@122.936,119.507 | length 49.3
  Top Layer w0.254: STM1.16 90.23,86.928 90.932,87.63 90.932,90.805 93.32,93.193 93.343,93.193 94.132,93.982 94.132,94.005 95.25,95.123 98.552,95.123 USART2.3@122.936,119.507
U13_RX: STM1.30 USART3.2@122.936,102.997 | length 44.9
  Top Layer w0.254: STM1.30 97.436,85.032 97.436,82.971 97.704,82.702 100.289,82.702 104.521,86.935 104.521,88.845 122.61,106.934 123.952,106.934 124.587,106.299 124.587,104.648 122.936,102.997 USART3.2@122.86,102.921
U13_TX: STM1.29 USART3.3@122.936,105.537 | length 39.3
  Top Layer w0.254: STM1.29 96.865,82.907 97.476,82.296 100.457,82.296 105.029,86.868 105.029,88.773 121.793,105.537 USART3.3@122.936,105.537
U22_RX: STM2.17 USART2.2@54.102,44.577 | length 88
  Top Layer w0.254: STM2.17 61.201,96.253 v1(62.103,97.155)
  Bottom Layer w0.254: USART2.2@54.102,44.577 52.984,43.459 49.505,43.459 48.285,44.679 48.285,91.438 45.847,93.876 45.847,102.743 48.133,105.029 54.229,105.029 v1(62.103,97.155)
U22_TX: STM2.16 USART2.3@56.642,44.577 | length 58.7
  Top Layer w0.254: v1(59.817,87.757) 58.928,88.646 58.928,92.71 60.575,94.357 62.527,94.357 STM2.16
  Bottom Layer w0.254: USART2.3@56.642,44.577 60.071,48.006 61.214,48.006 64.389,51.181 64.389,83.185 v1(59.817,87.757)
U23_RX: STM2.30 USART3.2@67.437,44.577 | length 76.3
  Top Layer w0.254: v1(47.244,95.758) 48.895,95.758 51.283,98.146 53.299,98.146 54.202,97.242 54.202,96.324 STM2.30 ; v1(60.833,49.657) 62.357,49.657 USART3.2@67.437,44.577
  Bottom Layer w0.254: v1(47.244,95.758) 47.244,93.054 48.692,91.606 48.692,50.876 49.911,49.657 v1(60.833,49.657) v1@60.96,49.657
U23_TX: STM2.29 USART3.3@69.977,44.577 | length 77.4
  Top Layer w0.254: v1(48.514,97.536) 48.895,97.536 49.911,98.552 53.467,98.552 54.702,97.317 54.702,96.324 STM2.29 ; v1(58.039,52.197) 62.357,52.197 USART3.3@69.977,44.577
  Bottom Layer w0.254: v1(48.514,97.536) 48.514,92.359 49.098,91.774 49.098,53.01 49.911,52.197 v1(58.039,52.197)
VCC1_3.3V: 1_3.3.2 1_3.3.4 1K.2@93.345,68.707 4.7K.2 10K.1@107.569,112.218 10nf.2@83.82,68.922 10uf.1@76.962,70.778 10uf.1@86.194,100.965 10uf.1@104.56,79.375 10uf.2@88.646,68.668 100nf.1@89.916,101.219 100nf.1@90.131,79.629 100nf.1@105.283,95.592 100nf.1@111.76,101.092 C1.1 NRF.2 STM1.1 STM1.13 STM1.19 STM1.32 STM1.48 STM1.64 SWD1.1 VP1.3 | length 266.4
  Top Layer w0.254: 4.7K.2 71.716,77.636 70.958,78.394 70.958,79.791 74.2,83.033 81.763,83.033 v1(81.915,83.185) 81.915,75.731 10uf.1@76.962,70.778 ; 10nf.2@83.82,68.922 86.106,71.208 v1(86.106,84.963) 87.63,86.487 87.63,87.884 88.174,88.428 STM1.13 89.825,88.428 90.272,88.875 90.272,93.979 89.893,94.357 89.111,94.357 STM1.1 STM1.64 90.678,96.44 90.678,100.457 89.916,101.219 89.662,100.965 10uf.1@86.194,100.965 ; 10uf.2@88.646,68.668 90.131,70.153 100nf.1@90.131,79.629 ; 100nf.1@90.17,79.629 90.17,82.551 91.794,84.175 91.794,85.032 STM1.19 ; STM1.32 98.632,84.836 v1(100.076,84.836) 100.457,84.836 102.997,87.376 102.997,89.408 106.934,93.345 106.934,95.25 106.592,95.592 100nf.1@105.283,95.592 ; STM1.48 104.119,94.428 100nf.1@105.283,95.592 ; v1(109.601,99.91) 100nf.1@105.283,95.592 ; v1(115.912,93.599) 122.936,86.575 SWD1.1
  Top Layer w0.5: 1_3.3.4 1_3.3.2 72.898,69.296 C1.1 10uf.1@76.962,70.778 ; 10nf.2@84.074,68.668 88.646,68.668 98.005,68.668 99.644,70.307 VP1.3
  Bottom Layer w0.254: v1(81.915,83.185) 83.693,84.963 v1(86.106,84.963) 86.233,84.836 v1(100.076,84.836) 100.076,78.359 99.695,77.978 99.695,75.565 100.457,74.803 102.362,74.803 104.56,77.001 10uf.1@104.56,79.375 ; 10K.1@107.569,112.218 112.649,107.138 112.649,101.981 111.76,101.092 110.783,101.092 v1(109.601,99.91) v1(115.912,93.599) ; SWD1.1 125.349,83.947 125.349,45.212 NRF.2
VCC1_5V: 1_3.3.3 5V.1@100.457,49.488 10uf.1@69.215,70.778 100nf.1@71.797,70.778 BM1.4 BM2.4 M1.10 USART2.4@122.936,122.047 USART3.4@122.936,108.077 | length 222.2
  Top Layer w0.254: USART2.4@122.682,121.793 USART2.4@122.936,122.047
  Top Layer w0.6: 10uf.1@69.215,70.778 69.399,70.778 70.598,69.579 ; 100nf.1@71.797,70.778 70.598,69.579 ; USART2.4@122.682,121.793 BM1.4 114.554,123.825 106.172,123.825 104.14,121.793 BM2.4 101.321,123.444 93.091,123.444 89.916,120.269 v1(89.916,117.602) 89.916,113.284 75.819,99.187 75.819,85.471 69.596,79.248 69.596,75.057 65.659,71.12 65.659,66.929 67.027,65.561 1_3.3.3 70.598,69.579 ; USART3.4@122.936,108.077 124.714,109.855 124.714,120.269 USART2.4@122.936,122.047
  Top Layer w1.27: 1_3.3.3 67.945,62.908 67.945,57.658 73.194,52.409 97.536,52.409 5V.1@100.457,49.488
  Bottom Layer w0.6: M1.10 49.53,117.729 v1@89.789,117.729
VCC1_7V: 
VCC2_3.3V: 1K.2@107.442,69.596 2_3.3.2 2_3.3.4 10nf.2@110.275,74.93 10uf.1@51.347,81.915 10uf.1@56.134,68.241 10uf.1@61.302,81.915 10uf.2@110.275,70.934 100nf.1@51.22,78.74 100nf.1@52.236,101.219 100nf.1@65.317,98.171 100nf.1@66.587,103.759 C7.1 RLED.2 STM2.1 STM2.13 STM2.19 STM2.32 STM2.48 STM2.64 SWD2.1 VP2.3 | length 303.8
  Top Layer w0.254: v1@49.53,101.219 100nf.1@52.236,101.219 ; v1(51.321,96.253) STM2.32 53.273,95.19 53.848,94.615 59.058,94.615 59.844,95.4 59.844,96.182 STM2.19 59.844,96.324 59.844,97.106 60.909,98.171 100nf.1@65.317,98.171 ; STM2.48 51.448,84.973 51.841,84.58 51.841,82.409 51.347,81.915 51.22,81.788 51.22,78.74 51.22,77.128 50.8,76.708 50.8,75.565 52.197,74.168 52.197,72.771 53.298,71.67 C7.1 ; 58.801,55.424 62.611,59.234 62.611,70.612 60.198,73.025 60.198,77.47 65.151,82.423 v1(67.818,82.423) 71.501,82.423 74.803,85.725 74.803,100.457 69.85,105.41 67.31,105.41 66.587,104.687 66.587,103.759 66.587,99.441 100nf.1@65.317,98.171 ; 10uf.1@61.302,81.915 61.302,84.574 STM2.64 STM2.1 63.821,86.928 v1(64.897,85.852) ; STM2.13 64.099,92.928 65.913,94.742 65.913,97.575 100nf.1@65.317,98.171 ; v1(66.623,55.424) 73.152,48.895 86.36,48.895 89.408,45.847 89.408,43.688 87.884,42.164 82.042,42.164 SWD2.1 ; v1(107.823,72.644) 107.442,72.263 107.442,69.596 108.937,69.596 110.275,70.934 10nf.2@110.275,74.93
  Top Layer w0.6: 10uf.1@56.134,68.241 C7.1 52.324,67.267 2_3.3.2 2_3.3.4 58.801,55.424 v1(66.623,55.424) ; v1(102.489,51.181) 103.632,51.181 104.318,51.867 VP2.3 104.318,55.296 105.029,56.007 117.856,56.007 v1(118.11,55.753)
  Bottom Layer w0.254: v1(49.403,101.092) 51.321,99.174 v1(51.321,96.253) ; v1(64.897,85.852) 64.897,85.344 v1(67.818,82.423)
  Bottom Layer w0.6: v1(66.623,55.424) 88.086,55.424 89.916,53.594 99.568,53.594 101.981,51.181 v1(102.489,51.181) ; v1@107.95,72.39 110.998,72.39 118.11,65.278 v1(118.11,55.753)
VCC2_5V: 2_3.3.3 5V.1@93.345,49.361 10uf.1@46.863,66.587 100nf.1@50.673,65.317 BM3.4 BM4.4 BM5.4 BM6.4 M2.10 M3.10 USART2.4@59.182,44.577 USART3.4@72.517,44.577 | length 227.8
  Top Layer w0.5: M3.10 47.392,61.616 47.392,64.114 v1(47.244,64.262) ; 47.1,61.324 2_3.3.3 50.024,62.978 50.673,63.627 v1(51.054,63.627)
  Top Layer w1.27: v1(38.481,90.805) 38.481,122.301 40.259,124.079 46.228,124.079 BM6.4 50.927,124.206 59.715,124.206 BM5.4 64.541,124.206 73.533,124.206 BM4.4@75.743,121.996 ; BM4.4 BM4.4@75.743,121.996 ; BM3.4 86.995,124.155 77.267,124.155 75.743,122.631 BM4.4@75.743,121.996
  Bottom Layer w0.5: 10uf.1@46.863,66.587 46.863,64.77 v1@47.117,64.516 ; v1@50.673,64.008 100nf.1@50.673,65.317
  Bottom Layer w1.27: M3.10 43.688,58.547 40.64,61.595 39.624,61.595 38.735,60.706 38.735,45.085 41.529,42.291 56.896,42.291 59.182,44.577 61.214,42.545 70.485,42.545 72.517,44.577 77.301,49.361 5V.1@93.345,49.361 ; M2.10 v1(38.481,90.805) 38.481,71.882 43.776,66.587 10uf.1@46.863,66.587
VCC3.3: 
XTAL11: 2.1 22pf.2@84.328,93.384 STM1.5 | length 9.7
  Top Layer w0.254: 2.1 81.622,93.384 84.328,93.384 85.284,92.428 STM1.5
XTAL12: 2.2 22pf.2@84.328,91.02 STM1.6 | length 9.7
  Top Layer w0.254: 2.2 81.622,91.02 84.328,91.02 85.236,91.928 STM1.6
XTAL21: 5.1 22pf.2@67.818,88.099 STM2.5 | length 10.2
  Top Layer w0.254: STM2.5 66.989,88.928 67.818,88.099 70.524,88.099 5.1
XTAL22: 5.2 22pf.2@67.818,90.336 STM2.6 | length 10.3
  Top Layer w0.254: STM2.6 66.91,89.428 67.818,90.336 70.397,90.336 5.2
pads on no net: M1.1 M1.5 M2.1 M2.5 M3.1 M3.5 STM1.2 STM1.3 STM1.4 STM1.10 STM1.11 STM1.14 STM1.15 STM1.39 STM1.40 STM1.41 STM1.44 STM1.45 STM1.51 STM1.52 STM1.53 STM1.54 STM1.56 STM1.57 STM1.60 STM2.2 STM2.3 STM2.4 STM2.8 STM2.9 STM2.10 STM2.11 STM2.20 STM2.21 STM2.24 STM2.45 STM2.51 STM2.52 STM2.53 STM2.54 STM2.56 STM2.57 STM2.60

## Polygon pours and split planes (outlines as drawn)
GND on Top Layer "Bottom Layer-No Net" (solid, remove dead copper, pour order 12): 31.877,129.54 33.655,127.762 130.81,127.762 130.81,40.259 128.143,37.592 127.381,38.354 34.29,38.354
GND on Bottom Layer "Bottom Layer-No Net" (solid, remove dead copper, pour order 14): 33.02,129.413 126.238,129.413 128.651,127 128.397,126.746 128.397,33.655 41.148,33.655 33.909,40.894

## Keep-outs
Keep-Out Layer:
  the board outline again, w0.254

## Silkscreen, mask and mechanical layers (free items; w line width, h text height)
Top Overlay:
  text "GND" at 119.38,92.202 h1.52 r90
  text "RX" at 49.022,48.133 h1.52
  text "5V" at 54.864,48.133 h1.52

## Text inside footprints (layer, text, board x,y; h text height)
NRF: Top Overlay "8" at 114.3,43.815 h1.27 r180; Top Overlay "7" at 114.3,46.355 h1.27 r180; Top Overlay "1" at 125.476,46.355 h1.27 r180; Top Overlay "2" at 125.984,43.815 h1.27 r180
?: Top Layer "RESCUE" at 80.645,58.674 h0.76; Top Layer "N W P U" at 80.645,60.198 h0.76; Bottom Layer "RESCUE" at 80.645,58.674 h0.76; Bottom Layer "N W P U" at 80.645,60.198 h0.76